# Altium PCB triumvi_integrated_v2_base.PcbDoc (part 2 of 2)
Units mil, origin at the board's own origin, x right, y up, seen from the top; angles counter-clockwise.
Board outline 2450 x 750 mil, 6 copper layers (Top Layer, GND, Signal Layer 1, Signal Layer 2, VCC, Bottom Layer), stack 48.468 mil thick; 139 components, 107 nets, 501 pads, 187 vias.
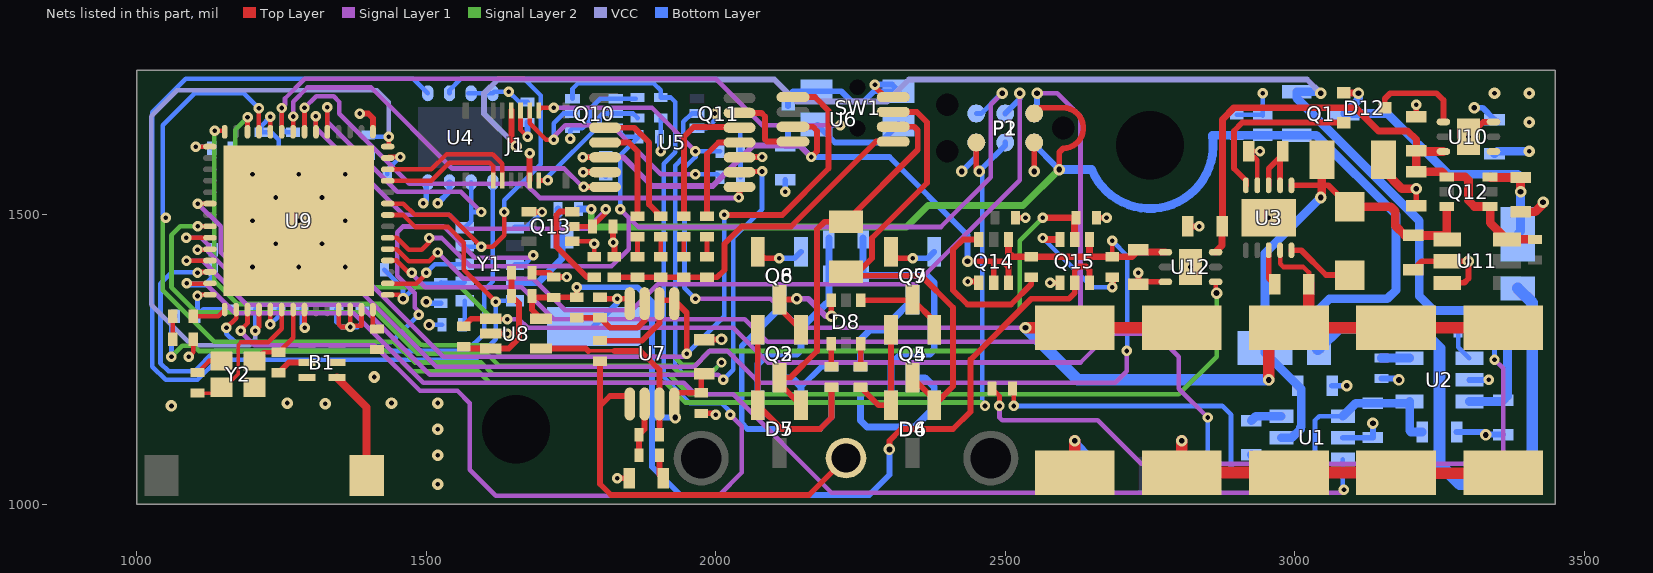
[diagram p6: the nets of this part, all layers, seen from the top]

## Via types
v1: diameter 18, hole 8, Top Layer to Bottom Layer, 121 vias
v2: diameter 20, hole 10, Top Layer to Bottom Layer, 37 vias
v3: diameter 22, hole 8, Top Layer to Bottom Layer, 14 vias
v4: diameter 20, hole 8, Top Layer to Bottom Layer, 13 vias
v5: diameter 21.65, hole 8, Top Layer to Bottom Layer, 2 vias

## Nets (pads, with @x,y where several pads share a name; then routed paths per layer and width w, separated by ;. In a path a pad name is that pad's centre, name@x,y a point inside that pad or via, vN(x,y) a via of type N, cw(c..) or ccw(c..) an arc to the next point about the centre after c; other vN are vias at no path point) (continued)
GND: B1.2 B1.5 B1.6 C2.1 C3.1 C4.2 C5.2 C8.2 C9.2 C10.2 C11.2 C12.2 C13.2 C15.2 C16.2 C17.2 C18.2 C19.2 C20.2 C21.2 C22.2 C23.2 C24.2 C25.2 C26.2 C27.2 C28.2 C29.2 C30.2 C31.2 C32.2 C33.2 C34.2 C35.2 C36.2 C37.2 C38.2 C39.2 C40.2 C41.2 C42.2 C43.2 C44.2 C45.2 C46.2 C47.2 D9.1 J1.5 J1.9 P1.5 P2.2 pad.@2650,1050 Q6.2 Q7.2 Q8.2 Q9.2 Q10.1 Q10.4 Q11.1 Q13.1 Q14.1 Q15.1 R2.2 R3.2 R4.2 R24.2 R25.2 R33.2 R35.2 R38.2 R41.2 R42.2 SW1.2 U1.2 U2.2 U3.9 U3.11 U4.4 U5.3 U5.13 U6.4 U7.4 U8.2 U9.1 U9.57 U10.3 U10.7 U11.2 U11.3 U12.3 U12.7 Y1.6 Y2.2 Y2.4 | length 3883.2
  Top Layer w8: C36.2@1105,1227.72 1124.92,1247.64 Y2.4@1146.46,1247.64 ; J1.9@1662.87,1680.63 1662.87,1647.13 v1(1675,1635) ; C15.2@2920.47,1610 v1(2940,1610) ; C15.2@2930.24,1600.24 2935.32,1595.16 U3.9@2935.32,1551.1
  Top Layer w10: C37.2@1245,1227.28 1262.72,1245 B1.5@1294.41,1245 ; v1(1385,1675) 1400,1675 1407.95,1667.05 U9.1@1407.95,1643.54 ; U8.2@1611.69,1295 v1(1640,1295) ; Q13.1@1677.6,1505.59 1678.19,1505 v1(1700,1505) ; J1.5@1678.62,1559.37 v1(1678.62,1606.38) ; R25.2@1682.72,1400 1712.72,1400 C23.2@1720,1392.72 v1(1742.72,1392.72) ; v1(1771.18,1573.82) U5.13@1808.86,1573.82 ; R24.2@1800,1357.72 1802.72,1355 v1(1830,1355) 1849.29,1355 U7.4@1851.61,1352.68 ; R38.2@1822.72,1480 v1(1822.72,1452.28) 1825,1450 C22.2@1825,1427.72 ; v1(1830,1045) C26.2@1850.47,1045 ; C24.2@1975,1157.28 1997.72,1157.28 v1(2000,1155) ; C25.2@1980,1284.53 2009.53,1284.53 v2(2010,1285) ; U5.3@2041.14,1599.41 2041.73,1600 v1(2080,1600) ; Q8.2@2072.6,1436.34 2083.94,1425 v1(2110,1425) ; v1(2275,1725) 2275,1721.06 U6.4@2292.68,1703.39 ; Q7.2@2302.6,1436.34 2313.94,1425 v1(2340,1425) ; v1(2435,1385) 2452.01,1385 Q14.1@2454.41,1382.6 ; R41.2@2517.72,1495 v1(2535,1495) ; v2(2550,1575) P2.2@2550,1625 ; v1(2577.4,1382.6) Q15.1@2594.41,1382.6 ; R42.2@2657.72,1495 v1(2675,1495) ; v1(2730,1400) C46.2@2730,1380.47 2733.94,1384.41 U12.3@2776.69,1384.41 ; C47.2@2815.47,1480 v1(2835,1480) ; C44.2@3205,1405.47 3219.53,1420 U11.2@3263.43,1420 v2(3300,1420) 3300,1390 3292.6,1382.6 U11.3@3263.43,1382.6 U11.3@3261.02,1385 ; C45.2@3210,1515.47 v2(3210,1545) ; C42.2@3210,1669.53 v1(3210,1690) ; v5(3300,1635) 3325.59,1660.59 U10.3@3343.31,1660.59
  Top Layer w15: C13.2@3153.15,1595 3153.15,1576.85 3185,1545 v2(3210,1545) ; C41.2@3390,1505.47 3415.47,1505.47 3429,1519 v2(3429,1521.88)
  Top Layer w20: C8.2@2620,1055 v2(2620,1110) ; v2(2805,1110) C9.2@2805,1055 C12.2@2990,1055 C11.2@3175,1055 3175,1054 3360,1054 C10.2@3360,1055
  Bottom Layer w8: v1(1748.82,1631.38) 1748.82,1645.63 Q10.4@1752.6,1649.41 1769.41,1649.41 1782.2,1662.2 1782.2,1682.2 1800.59,1700.59 Q10.1@1827.4,1700.59 R33.2@1862.13,1700.59 ; Q11.1@1967.6,1649.41 1984.41,1649.41 2000,1665 2000,1673.58 v1(1998.58,1675) ; R3.2@2900,1672.72 2944.02,1672.72 D9.1@2945,1671.73 v1(2945,1710)
  Bottom Layer w10: C40.2@1165,1372.72 C40.2@1167.72,1372.72 ; R4.2@1167.72,1405 C40.2@1167.72,1372.72 ; C35.2@1167.72,1440 1167.72,1410 v3(1200,1410) C29.2@1200,1372.72 ; v3(1200,1570) 1215,1570 C31.2@1215,1607.28 ; C28.2@1245,1372.72 C29.2@1205,1372.72 C29.2@1200,1372.72 ; C34.2@1345,1372.72 1360,1372.72 v3(1360,1410) 1392.28,1410 C38.2@1392.28,1405 1390,1405 C32.2@1390,1372.72 ; v3(1360,1570) C39.2@1397.28,1570 ; v1@1492.28,1517.28 v1(1495,1520) 1500,1525 1500,1553.66 U4.4@1502.8,1556.46 ; v2(1500,1350) 1502.72,1347.28 C17.2@1525,1347.28 ; Y1.6@1653.31,1477.99 1672.99,1477.99 v1(1700,1505) ; v1(1675,1635) C16.2@1675,1659.57 ; v1(1771.18,1573.82) 1803.46,1573.82 C19.2@1810,1567.28 ; C18.2@1789.41,1307.17 1830,1347.76 v1(1830,1355) ; v1(2110,1425) 2136.06,1425 Q6.2@2147.4,1436.34 ; v1(2120,1540) C20.2@2120,1560.47 ; C21.2@2125,1687.72 2125,1705 2133.54,1713.54 SW1.2@2174.13,1713.54 2216.85,1713.54 2234.74,1695.65 2255.26,1695.65 2273.15,1713.54 SW1.2@2315.87,1713.54 2304.41,1725 v1(2275,1725) ; v1(2340,1425) 2366.06,1425 Q9.2@2377.4,1436.34 ; v2(2425,1575) 2450,1600 P1.5@2450,1625 ; v2(2620,1110) 2650,1080 pad.@2650,1050 ; C2.1@3064.53,1205 v2(3090,1205) ; U1.2@3083.15,1115 3134.53,1115 C3.1@3135,1115.47 v2(3135,1140) ; R2.2@3150,1217.28 3177.72,1217.28 v2(3180,1215) ; C4.2@3279.53,1125 3325,1125 v2(3330,1120) 3330.47,1120.47 C5.2@3360,1120.47 ; U2.2@3301.57,1215 v1(3335,1215) ; v2(3310,1685) 3324.53,1685 C43.2@3345,1664.53 ; C40.2@1167.72,1372.72 C29.2@1200,1372.72
  other v3: 1280,1410 1240,1450 1320,1450 1200,1490 1280,1490 1360,1490 2955,1495 1240,1530 1320,1530 1280,1570
  other v4: 1520,1035 1520,1085 1520,1130 1060,1170 1325.4,1174 1260,1175 1440,1175 1520,1175 1410,1220
  other v5: 2820,1410
I2C_SCL: J1.1 U9.53 | length 222.3
  Top Layer w8: U9.53@1433.54,1558.9 1508.9,1558.9 1540,1590 1610,1590 1615.63,1584.37 J1.1@1615.63,1559.37
I2C_SDA: J1.2 U9.54 | length 244.7
  Top Layer w8: U9.54@1433.54,1578.58 1508.58,1578.58 1535,1605 1614.8,1605 1631.38,1588.42 J1.2@1631.38,1559.37
IN+: D4.1 Q4.3 R9.1 U6.3 | length 864.2
  Top Layer w10: U6.3@2292.68,1677.8 U6.3@2306.61,1677.8 2347.2,1677.8 2365,1660 2365,1555 2270,1460 2270,1425 2246.69,1401.69 R9.1@2225,1401.69 2231.69,1395 2355,1395 2410,1340 2410,1203.94 D4.1@2377.4,1171.34 2377.4,1181.26 Q4.3@2340,1218.66
IN-: D5.1 Q2.3 R9.2 U6.2 | length 680.5
  Top Layer w10: D5.1@2147.4,1171.34 2110,1208.74 Q2.3@2110,1218.66 2128.66,1218.66 2175,1265 2175,1475 2188.31,1488.31 R9.2@2225,1488.31 2349,1612.31 2349,1646 2342.8,1652.2 U6.2@2306.61,1652.2 U6.2@2292.68,1652.2
LDO_EN: D12.3 U10.4 | length 163.2
  Top Layer w10: D12.3@3155.43,1685 3155.43,1700.43 3165,1710 3245,1710 3256.69,1698.31 U10.4@3256.69,1660.59
NetANT1_1: ANT1.1 B1.1 | length 190.8
  Top Layer w14: B1.1@1345.59,1219.41 1397.17,1167.83 ANT1.1@1397.17,1050
NetC1_1: C1.1 U1.4 | length 55.1
  Bottom Layer w15: C1.1@2925,1085.47 2932.87,1077.6 U1.4@2976.85,1077.6
NetC1_2: C1.2 U1.6 | length 55.1
  Bottom Layer w15: C1.2@2925,1144.53 2932.87,1152.4 U1.6@2976.85,1152.4
NetC3_2: C3.2 C4.1 D2.1 U1.1 U2.4 | length 990
  Top Layer w8: D2.1@2512.72,1200 2515,1197.72 v1(2515,1170)
  Bottom Layer w8: v1(2515,1170) 2875,1170 2890,1155 2890,1065 2905,1050 3020,1050 3035,1065 3035,1145 3042.4,1152.4 U1.1@3083.15,1152.4
  Bottom Layer w15: U1.1@3083.15,1152.4 3105.28,1174.53 C3.2@3135,1174.53 3195.35,1174.53 U2.4@3198.43,1177.6 3198.43,1127.05 3200.47,1125 C4.1@3220.47,1125
NetC6_1: C6.1 C7.1 D6.1 Q5.2 | length 464.5
  Bottom Layer w12: C7.1@2254.53,1460 C6.1@2254.53,1395 2365,1395 2377.4,1382.6 Q5.2@2377.4,1301.34 2377.4,1267.4 2370,1260 2320,1260 2302.6,1242.6 D6.1@2302.6,1171.34
NetC6_2: C6.2 C7.2 D7.1 Q3.2 | length 370.1
  Bottom Layer w12: D7.1@2072.6,1171.34 2072.6,1242.6 2090,1260 2140,1260 2147.4,1267.4 Q3.2@2147.4,1301.34 2147.4,1303.51 2190.89,1347 2193.06,1347 2195.47,1349.41 C6.2@2195.47,1395 C7.2@2195.47,1460
NetC14_2: C14.2 U3.3 | length 63.2
  Top Layer w10: U3.3@2955,1438.9 2955,1390.47 C14.2@2965.47,1380
NetC15_1: C15.1 U3.7 U3.8 | length 117.6
  Top Layer w10: U3.8@2955,1551.1 2955,1580 C15.1@2974.68,1599.68 ; U3.7@2974.68,1551.1 C15.1@2974.68,1599.68 ; C15.1@2979.53,1610 2974.68,1605.16 C15.1@2974.68,1599.68
NetC18_1: C18.1 R11.2 Y1.9 | length 186.5
  Bottom Layer w12: Y1.9@1653.31,1383.5 1693.5,1383.5 1734.29,1424.29 C18.1@1734.29,1461.69 1727.28,1468.7 R11.2@1727.28,1510
NetC26_1: C26.1 R27.2 | length 42.8
  Top Layer w10: R27.2@1902.72,1085 1902.72,1051.81 C26.1@1909.53,1045
NetC27_1: C27.1 C29.1 U9.32 U9.56 | length 1171.3
  Top Layer w8: v1(1205,1300) 1211.1,1306.1 U9.32@1211.1,1336.46 ; U9.56@1433.54,1617.95 1435,1619.41 v1(1435,1635)
  VCC w8: v1(1205,1300) 1205,1285 1195,1275 1095,1275 1025,1345 1025,1670 1070,1715 1415,1715 1435,1695 v1(1435,1635)
  Bottom Layer w8: v1(1205,1300) C29.1@1205,1337.28 ; C27.1@1407.72,1635 v1(1435,1635)
NetC36_1: C36.1 U9.34 Y2.1 | length 253.7
  Top Layer w6: C36.1@1105,1192.28 1136.38,1192.28 Y2.1@1146.46,1202.36 1152.36,1202.36 1175,1225 1175,1275 1180,1280
  Top Layer w8: 1180,1280 1226.87,1280 1250.47,1303.6 U9.34@1250.47,1336.46
NetC37_1: C37.1 U9.35 Y2.3 | length 131.9
  Top Layer w8: Y2.3@1203.54,1247.64 1218.62,1262.72 C37.1@1245,1262.72 1270.16,1287.87 U9.35@1270.16,1336.46
NetC40_1: C40.1 R34.1 U9.28 | length 122.4
  Top Layer w8: v1(1105,1360) 1107.05,1362.05 U9.28@1126.46,1362.05
  Bottom Layer w8: R34.1@1102.72,1325 R34.1@1105,1327.28 ; v1(1105,1360) R34.1@1105,1327.28 ; C40.1@1165,1337.28 1115,1337.28 R34.1@1105,1327.28
NetD2_2: D2.2 R1.1 | length 1200.1
  Top Layer w8: D2.2@2477.28,1200 2490,1187.28 v1(2490,1170)
  Signal Layer 1 w8: v1(2490,1170) 2490,1150 2495,1145 2660,1145 2735,1070 3350,1070 3360,1080 3360,1235 v1(3345,1250)
  Bottom Layer w8: R1.1@3317.72,1300 3345,1272.72 v1(3345,1250)
NetD4_2: D4.2 Q4.2 R5.1 | length 195.4
  Top Layer w10: R5.1@2250,1202.28 2280.94,1171.34 D4.2@2302.6,1171.34 Q4.2@2302.6,1301.34
NetD5_2: D5.2 Q2.2 R6.1 | length 335.1
  Top Layer w10: Q2.2@2072.6,1301.34 D5.2@2072.6,1171.34 2113.94,1130 2180,1130 2200,1150 R6.1@2200,1202.28
NetD6_2: D6.2 Q5.3 R7.1 | length 282.5
  Bottom Layer w12: R7.1@2250,1202.28 2250,1145 2261.25,1133.75 2343.75,1133.75 2377.4,1167.4 D6.2@2377.4,1171.34 2377.4,1202.6 2361.34,1218.66 Q5.3@2340,1218.66
NetD7_2: D7.2 Q3.3 R8.1 | length 142.5
  Bottom Layer w10: 2147.4,1202.6 2182.52,1237.72 R8.1@2200,1237.72
  Bottom Layer w12: Q3.3@2110,1218.66 2131.34,1218.66 2147.4,1202.6 D7.2@2147.4,1171.34
NetD8_1: D8.1 Q4.1 Q7.3 | length 157.7
  Top Layer w10: D8.1@2250.59,1352.4 2338.74,1352.4 Q7.3@2340,1353.66 2377.4,1316.26 Q4.1@2377.4,1301.34
NetD8_3: D8.3 Q2.1 Q8.3 | length 198.4
  Top Layer w10: v2(2140,1355) 2138.66,1353.66 Q8.3@2110,1353.66 2110,1338.74 Q2.1@2147.4,1301.34 ; D8.3@2199.41,1352.4 2199.41,1325.59 v2(2200,1325)
  Signal Layer 1 w10: v2(2140,1355) 2160,1355 2190,1325 v2(2200,1325)
NetD8_4: D8.4 R6.2 | length 40.1
  Top Layer w10: D8.4@2199.41,1277.6 2199.41,1238.31 R6.2@2200,1237.72
NetD8_6: D8.6 R5.2 | length 40.1
  Top Layer w10: R5.2@2250,1237.72 2250.59,1238.31 D8.6@2250.59,1277.6
NetD10_1: D10.1 R31.1 | length 40
  Top Layer w8: R31.1@1062.28,1285 D10.1@1062.28,1325
NetL1_2: L1.2 U3.5 | length 118.4
  Top Layer w10: U3.5@2994.37,1438.9 3011.1,1438.9 3054.06,1395.94 L1.2@3095,1395.94
NetQ3_1: Q3.1 Q6.3 R8.2 | length 460.3
  Bottom Layer w10: Q3.1@2072.6,1301.34 2045,1273.74 2045,1140 2055,1130 2180,1130 2200,1150 R8.2@2200,1202.28
  Bottom Layer w12: Q3.1@2072.6,1301.34 2110,1338.74 Q6.3@2110,1353.66
NetQ5_1: Q5.1 Q9.3 R7.2 | length 174.5
  Bottom Layer w12: R7.2@2250,1237.72 2250,1285 2266.34,1301.34 Q5.1@2302.6,1301.34 2302.6,1316.26 Q9.3@2340,1353.66
NetQ10_6: Q10.6 R32.2 U9.31 | length 2065
  Top Layer w8: v1(1180,1300) 1180,1301.87 1191.42,1313.29 U9.31@1191.42,1336.46
  Signal Layer 1 w8: v1(1180,1300) 1180,1298.13 1203.13,1275 1410.2,1275 1489.2,1196 1554,1196 1575,1175 1575,1060 1620,1015 2005,1015 2045,1055 2045,1135 v1(2025,1155)
  Bottom Layer w8: Q10.6@1752.6,1700.59 1752.6,1717.6 1762.72,1727.72 1892.28,1727.72 1905,1715 R32.2@1905,1702.72 1922.28,1702.72 1930,1695 1930,1608.13 1910,1588.13 1910,1220 1955,1175 2010,1175 2025,1160 v1(2025,1155)
NetQ11_2: Q11.2 U9.22 | length 1732
  Top Layer w8: v1(1105.16,1480.16) U9.22@1126.46,1480.16
  Signal Layer 2 w8: v1(1105.16,1480.16) 1075.16,1480.16 1060,1465 1060,1375 1103,1332 1413,1332 1485,1260 1605,1260 1620,1245 1620.2,1245 1626.2,1239 1924.33,1239 1936.33,1227 1992,1227 v1(2010,1245)
  Bottom Layer w8: Q11.2@1967.6,1675 1958.3,1675 1944,1660.7 1944,1599.2 1930,1585.2 1930,1240 1945,1225 1990,1225 v1(2010,1245)
NetQ13_5: Q13.5 R38.1 U9.6 | length 712.7
  Top Layer w8: U9.6@1309.53,1643.54 v1(1309.53,1670.47) ; Q13.5@1752.4,1480 R38.1@1787.28,1480 1810,1502.72 v1(1810,1510) ; v1@1812.5,1507.5 v1@1815,1510
  Signal Layer 1 w8: v1(1309.53,1670.47) 1309.53,1650.47 1460,1500 1540,1500 1564,1476 1777.87,1476 1810,1508.13 v1(1810,1510)
NetQ13_6: Q13.6 R37.2 | length 171.6
  Top Layer w10: Q13.6@1752.4,1505.59 1730.59,1505.59 1725,1500 1725,1445 1777.72,1392.28 R37.2@1790,1392.28
NetQ14_6: Q14.6 R39.2 | length 293.8
  Top Layer w10: Q14.6@2454.41,1457.4 2427.4,1457.4 2410,1440 2410,1370 2435,1345 2510,1345 2545,1380 R39.2@2545,1392.28
NetQ15_6: Q15.6 R40.2 | length 203
  Top Layer w12: v1(2565,1460) 2567.6,1457.4 Q15.6@2594.41,1457.4 ; v1(2685,1375) R40.2@2685,1392.28
  Bottom Layer w8: v1(2565,1460) 2650,1375 v1(2685,1375)
NetR1_2: R1.2 U2.1 | length 55.6
  Bottom Layer w8: R1.2@3282.28,1300 3282.28,1271.69 U2.1@3301.57,1252.4
NetR2_1: R2.1 U2.5 | length 48.6
  Bottom Layer w15: R2.1@3150,1252.72 3198.11,1252.72 U2.5@3198.43,1252.4
NetR4_1: R4.1 U1.3 U9.27 | length 2307.9
  Top Layer w8: v1(1086.73,1381.73) 1087.46,1381 1125.72,1381 U9.27@1126.46,1381.73
  Signal Layer 1 w8: v1(1086.73,1381.73) 1087.46,1381 1119,1381 1170,1330 1375,1330 1495,1210 1945,1210 1965,1190 2030,1190 2200,1020 3080,1020 v1(3085,1025)
  Bottom Layer w8: U1.3@3083.15,1077.6 3083.15,1026.85 v1(3085,1025)
  Bottom Layer w10: v1(1086.73,1381.73) 1088.46,1380 1120,1380 1132.28,1392.28 R4.1@1132.28,1405
NetR10_1: R10.1 Y1.1 | length 43.8
  Bottom Layer w8: R10.1@1562.28,1310 1566.69,1314.41 Y1.1@1566.69,1352.01
NetR12_2: R12.2 R13.1 | length 34.6
  Top Layer w8: R12.2@1985,1427.72 R13.1@1985,1462.28
NetR13_2: R13.2 U5.4 | length 171.7
  Top Layer w10: R13.2@1985,1497.72 1985,1605 2005,1625 U5.4@2041.14,1625
NetR14_2: R14.2 R15.1 | length 34.6
  Top Layer w8: R14.2@1945,1427.72 R15.1@1945,1462.28
NetR15_2: R15.2 U5.5 | length 241
  Top Layer w10: R15.2@1945,1497.72 1945,1635 1961.97,1651.97 2039.76,1651.97 U5.5@2041.14,1650.59
NetR16_2: R16.2 R17.1 | length 34.6
  Top Layer w8: R16.2@1865,1427.72 R17.1@1865,1462.28
NetR17_2: R17.2 U5.11 | length 174.6
  Top Layer w10: U5.11@1808.86,1625 1850,1625 1865,1610 R17.2@1865,1497.72
NetR18_2: R18.2 R19.1 | length 34.6
  Top Layer w8: R18.2@1905,1427.72 R19.1@1905,1462.28
NetR19_2: R19.2 U5.10 | length 222.3
  Top Layer w10: U5.10@1808.86,1650.59 1859.41,1650.59 1885,1625 1885,1517.72 R19.2@1905,1497.72
NetR20_2: R20.2 R21.1 R25.1 U8.3 | length 221.9
  Top Layer w10: R21.1@1565,1272.28 1567.87,1269.41 U8.3@1611.69,1269.41 1642.69,1269.41 1660,1286.72 1660,1347.28 R20.2@1647.28,1360 R25.1@1647.28,1400
NetR26_1: R26.1 R27.1 U7.6 | length 106.4
  Top Layer w10: R27.1@1867.28,1085 R26.1@1867.28,1120 1877.2,1129.92 U7.6@1877.2,1173.39 U7.6@1877.2,1187.32
NetR30_2: R30.2 SW1.1 U9.9 | length 1309.1
  Top Layer w8: U9.9@1250.47,1643.54 v1(1250.47,1684.53)
  Signal Layer 1 w8: v1(1250.47,1684.53) 1256.16,1690.21 1256.16,1700.96 1290.2,1735 2000,1735 2080,1655 v1(2215,1655)
  Bottom Layer w8: v1(1250.47,1684.53) 1250.47,1649.53 1257.28,1642.72 R30.2@1270,1642.72 ; SW1.1@2195,1655 v1(2215,1655)
  Bottom Layer w10: SW1.1@2175.59,1655 2205.8,1624.79 2284.2,1624.79 SW1.1@2315.87,1656.46
NetR35_1: R35.1 U9.42 | length 29.4
  Top Layer w8: R35.1@1407.95,1307.05 U9.42@1407.95,1336.46
NetU4_1: U4.1 U9.26 | length 1090.9
  Top Layer w8: v1(1105,1400) 1106.42,1401.42 U9.26@1126.46,1401.42
  Bottom Layer w8: v1(1105,1400) 1104.27,1400.73 1060.73,1400.73 1041,1381 1041,1244 1055,1230 1100,1230 1135,1265 1570,1265 1600,1295 1600,1370 1615,1385 U4.1@1615,1556.46
NetU9_11: U9.11 U12.4 | length 2585.9
  Top Layer w8: U9.11@1211.1,1643.54 1211,1643.65 1211,1683.8 v1(1211.1,1683.9) ; U12.4@2863.31,1384.41 2863.31,1366.69 v2(2865,1365) v2@2865,1370
  Signal Layer 2 w8: v1(1050,1495) 1045,1490 1045,1370 1134,1281 1444,1281 1480,1245 1595,1245 1615,1225 1918.53,1225 1953.53,1190 2800,1190 2865,1255 v2(2865,1365)
  Bottom Layer w8: v1(1050,1495) 1045,1500 1045,1655 1100,1710 1185,1710 v1(1211.1,1683.9)
PD3: D10.2 U9.29 | length 59.1
  Top Layer w8: D10.2@1097.72,1325 1140.59,1325 U9.29@1152.05,1336.46
PGOOD: D12.2 U3.10 | length 298
  Top Layer w10: U3.10@2915.63,1551.1 2915.63,1559.37 2895,1580 2895,1645 2909.41,1659.41 D12.2@3084.57,1659.41
R\D\Y\_\I\N\: D11.2 J1.8 Q10.5 | length 481
  Top Layer w8: J1.8@1678.62,1680.63 1678.62,1658.25 1706.87,1630 v1(1720,1630)
  Signal Layer 1 w8: v1(1720,1630) 1720,1635 1740,1655 1820,1655 1905,1570 v1(1965,1570)
  Bottom Layer w8: v1(1720,1630) 1720,1658.13 1736.87,1675 Q10.5@1752.6,1675 ; v1(1965,1570) 2002.28,1570 D11.2@2007.28,1565
R\E\A\D\Y\: D11.1 Q11.6 R28.2 | length 84.5
  Bottom Layer w8: Q11.6@2042.4,1649.41 2042.4,1610.31 R28.2@2042.72,1610 D11.1@2042.72,1565
R\E\S\E\T\: P1.3 P2.6 R34.2 | length 2061.7
  Top Layer w10: P2.6@2450,1625 2450,1580 v2(2455,1575)
  Signal Layer 2 w8: v1(1060,1255) 1079,1274 1097.87,1274 1106.87,1265 1440,1265 1475,1230 1590,1230 1610,1210 1913.73,1210 1947.73,1176 2459,1176 v1(2465,1170)
  Bottom Layer w8: v1(1060,1255) 1060,1317.72 R34.2@1067.28,1325 ; v2@2460,1580 2460,1175 v1(2465,1170)
  Bottom Layer w10: v2(2455,1575) 2460,1580 2500,1620 P1.3@2500,1625
RG1: C22.1 R12.1 R14.1 R16.1 R18.1 U6.1 | length 605
  Top Layer w10: C22.1@1825,1392.28 R16.1@1865,1392.28 R18.1@1905,1392.28 R14.1@1945,1392.28 R12.1@1985,1392.28 2002.28,1392.28 2015,1405 2015,1450 2045,1480 2130,1480 2276.61,1626.61 U6.1@2306.61,1626.61
RG2: U5.6 U6.8 | length 130.1
  Top Layer w10: U5.6@2041.14,1676.18 2078.82,1676.18 2085,1670 2085,1630 2088.39,1626.61 U6.8@2127.32,1626.61
RTC_CLKOUT: U9.44 Y1.3 | length 148.6
  Top Layer w8: U9.44@1433.54,1381.73 1434.28,1381 1482.87,1381 1500,1398.13 v1(1500,1400)
  Bottom Layer w8: v1(1500,1400) 1515,1415 Y1.3@1566.69,1415
RTC_CS: U9.30 Y1.8 | length 865.4
  Top Layer w8: v1(1155,1305) 1171.73,1321.73 U9.30@1171.73,1336.46
  Signal Layer 1 w8: v1(1487.14,1327.5) 1487.14,1332.86 1480,1340 1480,1365 1450,1395 1450,1470 1460,1480 1530,1480 1584,1426 1681.03,1426 v1(1685.01,1429.99)
  Bottom Layer w8: v1(1155,1305) 1155,1295 1170,1280 1439.64,1280 v1(1487.14,1327.5) ; Y1.8@1653.31,1415 1670.03,1415 v1(1685.01,1429.99)
SPI_CLK: U4.6 U9.51 Y1.4 | length 719.4
  Top Layer w8: U9.51@1433.54,1519.53 1460.47,1519.53 1480,1500 1540,1500 v1(1595,1445) 1615,1445 1635,1465 v1(1635,1505)
  Bottom Layer w8: U4.6@1540.2,1710 1540.2,1715.2 1560,1735 1668.83,1735 1697.62,1706.21 1697.62,1587.62 1635,1525 v1(1635,1505) ; Y1.4@1566.69,1446.5 1568.19,1445 v1(1595,1445)
SPI_MISO: U4.2 U9.5 Y1.5 | length 499.1
  Top Layer w8: v1(1329.21,1685.79) U9.5@1329.21,1643.54 U9.5@1330,1644.33
  Signal Layer 1 w8: v1(1329.21,1685.79) 1329.21,1660.79 1450,1540 1560,1540 v1(1595,1505)
  Bottom Layer w8: Y1.5@1566.69,1477.99 1577.6,1488.9 1577.6,1505 ; U4.2@1577.6,1556.46 1577.6,1505 ; v1(1595,1505) 1577.6,1505
SPI_MOSI: U4.5 U9.50 Y1.10 | length 1955.8
  Top Layer w8: U9.50@1433.54,1499.84 1460.36,1499.84 1481.2,1479 1537.87,1479 1565,1451.87 1565,1405 v1(1620,1350)
  Bottom Layer w8: U4.5@1502.8,1710 1477.8,1735 1085,1735 1027,1677 1027,1238 1050,1215 1105,1215 1140,1250 1585,1250 1620,1285 v1(1620,1350) 1622.01,1352.01 Y1.10@1653.31,1352.01
SW_A0: U5.1 U9.7 | length 903
  Top Layer w8: U9.7@1289.84,1643.54 v1(1289.84,1684.84)
  Top Layer w10: v1(2040,1530) 2041.14,1531.14 U5.1@2041.14,1548.23
  Signal Layer 1 w8: v1(1289.84,1684.84) 1310,1705 1340,1705 1350,1695 1350,1675 1471,1554 1671,1554 1695.77,1529.23 v1@2040,1529.23
SW_A1: U5.14 U9.8 | length 671.8
  Top Layer w8: U9.8@1270.16,1643.54 v1(1270.16,1669.84)
  Top Layer w10: v1(1771.77,1548.23) U5.14@1808.86,1548.23
  Signal Layer 1 w8: v1(1270.16,1669.84) 1270.16,1695.16 1295,1720 1405,1720 1545,1580 1738.13,1580 1769.9,1548.23 v1(1771.77,1548.23)
SW_EN: U5.2 U9.25 | length 1479.1
  Top Layer w8: v1(1086,1421) 1126.35,1421 U9.25@1126.46,1421.1 ; U5.2@2041.14,1573.82 2042.32,1575 v1(2080,1575)
  Signal Layer 1 w8: v1(1086,1421) 1114,1421 1190,1345 1385,1345 1506,1224 2004.16,1224 v1(2012.72,1215.44)
  Bottom Layer w8: v1(2012.72,1215.44) 2030,1232.73 2030,1460 2080,1510 v1(2080,1575)
TCK: P1.4 U9.47 | length 1436.3
  Top Layer w8: U9.47@1433.54,1440.79 1449.01,1440.79 1469.8,1420 1505,1420 v1(1520,1435)
  Signal Layer 1 w8: v1(1520,1435) 1565,1390 1685,1390 1740,1335 1855,1335 1900,1380 2345,1380 2525,1560 v2(2525,1710)
  Bottom Layer w10: P1.4@2500,1675 2525,1700 v2(2525,1710)
TDO: P1.6 Q10.3 R29.2 U9.48 | length 1614.3
  Top Layer w8: U9.48@1433.54,1460.47 1449.13,1460.47 1469.6,1440 1492.5,1440 1505,1452.5 v1(1505,1460)
  Signal Layer 1 w8: v1(1505,1460) 1526.97,1460 1575.99,1410.99 1734.12,1410.99 1734.85,1411.72 1750.59,1411.72 1751.32,1410.99 1818.54,1410.99 1819.27,1411.72 1820,1410.99 1850,1440.99 1850,1495 ; v1(1835,1510) 1850,1495 ; v2(2495,1710) 2475,1690 2475,1565 2389,1479 1866,1479 1850,1495
  Bottom Layer w8: Q10.3@1827.4,1649.41 1841.81,1635 R29.2@1867.28,1635 1835,1602.72 v1(1835,1510) ; P1.6@2450,1675 2458.28,1675 v2@2493.28,1710 ; v2@2490,1710 v2@2493.28,1710 ; v2(2495,1710) v2@2493.28,1710
TMS: P1.2 U9.46 | length 1753.3
  Top Layer w8: U9.46@1433.54,1421.1 1448.9,1421.1 1470,1400 v1(1475,1400)
  Signal Layer 1 w8: v1(1475,1400) 1475,1398.13 1498.13,1375 1665,1375 1720,1320 2050,1320 2089,1281 2596,1281 2630,1315 2630,1670 2590,1710 v2(2555,1710)
  Bottom Layer w10: P1.2@2550,1675 2555,1680 v2(2555,1710)
V_BATT: C5.1 J1.10 Q1.2 U2.3 | length 2496.3
  Top Layer w10: 1647.13,1627.87 J1.10@1647.13,1680.63
  VCC w10: v2(1655.77,1618.88) 1600,1674.64 1600,1710 1624,1734 2101,1734 2139.35,1695.65 2295.65,1695.65 2334,1734 3021,1734 v2(3045,1710)
  Bottom Layer w15: v2@3037.6,1712.4 Q1.2@3003.66,1712.4 3003.66,1701.18 3114.85,1590 3115,1590 3215,1490 3215,1360 3240,1335 3330,1335 3367.5,1297.5 3367.5,1187.03 C5.1@3360,1179.53 3358.07,1177.6 U2.3@3301.57,1177.6
V_EXTERNAL: C41.1 D3.2 D12.1 Q1.3 Q12.6 | length 597.9
  Top Layer w12: D12.1@3084.57,1710.59 3109.41,1710.59 v2(3110,1710)
  Top Layer w15: Q12.6@3337.4,1565.59 3338.46,1564.53 C41.1@3390,1564.53 v2(3390,1540)
  Bottom Layer w15: v2(3110,1710) 3110,1698.66 Q1.3@3086.34,1675 3160,1675 3265,1570 3385,1570 3390,1565 v2(3390,1540) 3390,1471.48 D3.2@3385,1466.48
V_HARVEST: C2.2 C13.1 C44.1 D1.2 L1.1 Q12.3 U1.5 U3.6 U11.1 | length 950.1
  Top Layer w10: U3.6@2994.37,1551.1 3046.85,1551.1 3057.95,1551.1 L1.1@3095,1514.06
  Top Layer w15: v2(3045,1530) 3046.85,1531.85 3046.85,1551.1 C13.1@3046.85,1595 ; L1.1@3095,1514.06 3165.94,1514.06 3173.78,1506.22 3173.78,1481.22 3190.47,1464.53 C44.1@3205,1464.53 3256.3,1464.53 U11.1@3262.6,1458.23 ; Q12.3@3262.6,1514.41 U11.1@3262.6,1458.23 ; U11.1@3263.43,1457.4 U11.1@3262.6,1458.23
  Bottom Layer w15: U1.5@2976.85,1115 2995,1115 3010,1130 3010,1132.96 3011.02,1133.98 3011.02,1199.45 C2.2@3005.47,1205 2948.52,1261.95 D1.2@2948.52,1270 2948.52,1433.52 v2(3045,1530)
V_PROG: D1.1 D3.1 D9.2 P1.1 P2.1 Q1.1 R3.1 R11.1 | length 3197.2
  Top Layer w10: P2.1@2550,1675 2560,1685 2600,1685 cw(c2600,1650) 2600,1615 2593.27,1608.27 v2(2593.27,1578.27)
  Signal Layer 2 w12: v1(1785,1510) 1785,1485 1791,1479 2329.3,1479 2366.3,1516 2531,1516 v2(2593.27,1578.27)
  Bottom Layer w10: P1.1@2550,1625 2550,1621.54 v2@2588.27,1583.27
  Bottom Layer w12: R11.1@1762.72,1510 v1(1785,1510)
  Bottom Layer w15: v2(2593.27,1578.27) 2648.93,1578.27 ; 2648.93,1578.94 ccw(c2750,1620) 2857.72,1637.28 R3.1@2900,1637.28 2900.31,1637.6 Q1.1@3003.66,1637.6 3037.4,1637.6 3175,1500 3175,1370 3160,1355 3060,1355 3042.03,1337.03 D1.1@3042.03,1270
  Bottom Layer w20: D1.1@3040,1267.97 D1.1@3042.03,1270 3077.03,1305 3215,1305 3250,1270 3250,1070 3285,1035 3380,1035 3410,1065 3410,1347.97 D3.1@3385,1372.97
V_SELECTED: C42.1 C45.1 C47.1 Q12.1 Q12.4 R36.1 U10.6 U11.6 U12.6 | length 993.2
  Top Layer w12: U12.6@2863.31,1435.59 2874.53,1446.81 C47.1@2874.53,1480 ; C47.1@2875,1480 2875,1665 2895,1685 3105,1685 3145,1645 3195,1645 3210,1630 C42.1@3210,1610.47
  Top Layer w15: C42.1@3210,1610.47 C42.1@3210,1608.35 ; U10.6@3256.69,1609.41 3211.06,1609.41 C42.1@3210,1608.35 ; R36.1@3415,1457.72 3366.89,1457.72 U11.6@3366.57,1457.4 3337.4,1486.57 Q12.4@3337.4,1514.41 3310.59,1514.41 3300,1525 3300,1560 3294.41,1565.59 Q12.1@3262.6,1565.59 3253.66,1574.53 C45.1@3210,1574.53 C42.1@3210,1608.35
VCAP: C8.1 C9.1 C10.1 C11.1 C12.1 C14.1 J1.7 R28.1 U3.4 | length 2555.9
  Top Layer w8: J1.7@1694.37,1680.63 1698.74,1685 v1(1720,1685) ; U3.4@2974.68,1438.9 2974.68,1415.32 2980,1410 3015,1410 3024.53,1400.47 C14.1@3024.53,1380
  Top Layer w20: v2(2535,1305) C8.1@2620,1305 C9.1@2805,1305 ; v2(2955,1215) 2955,1270 C12.1@2990,1305 ; C14.1@3024.53,1380 3024.53,1309.53 3020,1305 C11.1@3175,1305 C10.1@3360,1305
  Signal Layer 1 w8: v1(1720,1685) 1890,1685 v1(1965,1610) ; v1(1965,1355) 2095,1355 2145,1305 v2(2535,1305)
  Bottom Layer w8: v1(1965,1355) 1946,1374 1946,1581 1965,1600 v1(1965,1610) R28.1@2007.28,1610
  Bottom Layer w20: v2(2535,1305) 2625,1215 v2(2955,1215)
VCAP_LOOPBACK: J1.6 Q10.2 R33.1 | length 233.4
  Top Layer w8: J1.6@1694.37,1559.37 1709.37,1559.37 v1(1710,1560)
  Bottom Layer w8: v1(1710,1560) 1710,1565.69 1799.31,1655 1799.31,1669.31 1805,1675 Q10.2@1827.4,1675 1857.28,1675 R33.1@1865,1667.28
VCC_GATED1: C23.1 C24.1 C25.1 Q15.2 Q15.3 R20.1 R22.1 U7.8 U8.5 | length 1807.7
  Top Layer w10: U8.5@1698.31,1320.59 1682.72,1336.18 R20.1@1682.72,1360 1685.43,1357.28 C23.1@1720,1357.28 ; C23.1@1715.43,1357.72 R22.1@1760,1357.72 v1(1760,1375) ; v2(1930,1150) 1928.39,1151.61 U7.8@1928.39,1173.39 1928.39,1187.32 1933.78,1192.72 C24.1@1975,1192.72 1975,1220.47 C25.1@1980,1225.47 ; v2(2300,1095) 2300,1110 2320,1130 2410,1130 2440,1160 2440,1250 2545,1355 2610,1355 2620,1365 Q15.2@2620,1382.6 2620,1405 2625.72,1410.72 2639.28,1410.72 2645.59,1404.41 Q15.3@2645.59,1382.6
  Bottom Layer w10: v1(1760,1375) 1865,1375 1890,1350 1890,1150 ; v2(1930,1150) 1890,1150 ; v2(2300,1095) 2300,1051 2265,1016 1939,1016 1890,1065 1890,1150
VCC_GATED2: C19.1 C20.1 C21.1 Q14.2 Q14.3 U5.12 U6.7 | length 1229
  Top Layer w10: v1(1770.59,1599.41) U5.12@1808.86,1599.41 ; U6.7@2127.32,1652.2 U6.7@2133.39,1652.2 2167.8,1652.2 2175,1645 2175,1610 v1(2165,1600) ; v2(2435,1420) 2480,1420 ; Q14.2@2480,1382.6 2480,1420 ; Q14.3@2505.59,1382.6 2505.59,1409.41 2495,1420 2480,1420
  Signal Layer 1 w10: v1(1770.59,1599.41) 1840.59,1599.41 1890,1550 1995,1550 2065,1620 2145,1620 v1(2165,1600)
  Bottom Layer w10: v1(1770.59,1599.41) 1806.69,1599.41 C19.1@1810,1602.72 ; C21.1@2125,1652.28 2125,1624.53 C20.1@2120,1619.53 2145.47,1619.53 v1(2165,1600) 2300,1600 2435,1465 v2(2435,1420)
VCC_MCU: C16.1 C17.1 C28.1 C30.1 C31.1 C32.1 C33.1 C34.1 C35.1 C38.1 C39.1 C43.1 Q13.4 R10.2 R29.1 R30.1 R31.2 R32.1 R37.1 U4.3 U4.7 U4.8 U9.10 U9.15 U9.24 U9.33 U9.36 U9.39 U9.40 U9.41 U9.43 U9.55 U10.1 Y1.2 | length 1255.6
  Top Layer w8: v1(1090,1255) 1097.72,1262.72 R31.2@1097.72,1285 ; v1(1102.05,1617.95) U9.15@1126.46,1617.95 ; v1(1105,1440) 1125.67,1440 U9.24@1126.46,1440.79 ; U9.10@1230,1644.33 U9.10@1230.79,1643.54 v1(1230.79,1669.21) ; v1(1230.79,1310.79) U9.33@1230.79,1336.46 ; U9.36@1289.84,1336.46 1289.84,1305.16 v1(1290,1305) ; U9.39@1348.9,1336.46 1348.9,1311.1 1353.58,1306.42 v1(1368.58,1306.42) ; U9.40@1368.58,1336.46 v1(1368.58,1306.42) ; U9.41@1388.27,1336.46 1388.27,1308.27 1370.43,1308.27 v1(1368.58,1306.42) ; U9.43@1433.54,1362.05 1452.95,1362.05 v2(1460,1355) ; U9.55@1433.54,1598.27 1435.28,1600 v1(1455,1600) ; Q13.4@1752.4,1454.41 1785.59,1454.41 v1(1790,1450) R37.1@1790,1427.72
  Bottom Layer w8: v1(1102.05,1617.95) 1126.61,1617.95 C33.1@1129.57,1615 ; v1(1105,1440) C35.1@1132.28,1440 ; v1@1230,1311.57 v1(1230.79,1310.79) 1245,1325 C28.1@1245,1337.28 ; v1(1230.79,1669.21) 1215,1653.43 C31.1@1215,1642.72 1232.28,1642.72 1245,1630 1245,1615 1252.72,1607.28 R30.1@1270,1607.28 ; C30.1@1285,1337.28 1285,1310 v1(1290,1305) ; C34.1@1345,1337.28 1345,1315 1353.58,1306.42 v1(1368.58,1306.42) 1381.42,1306.42 1388.95,1313.95 1388.95,1336.24 C32.1@1390,1337.28 ; C38.1@1427.72,1405 1460,1372.72 v2(1460,1355) 1486,1381 1523.28,1381 C17.1@1525,1382.72 ; C39.1@1432.72,1570 1432.72,1577.72 v1(1455,1600) ; v2(1505,1310) R10.2@1527.28,1310 ; C17.1@1525.79,1383.5 C17.1@1525,1382.72 ; Y1.2@1566.69,1383.5 1565.91,1382.72 C17.1@1525,1382.72 ; U4.7@1572.6,1710 U4.7@1577.6,1710 U4.8@1615,1710 1617.72,1712.72 v1(1642.72,1712.72) 1660.43,1695 C16.1@1675,1695 ; v1(1905,1610) 1902.72,1612.28 R29.1@1902.72,1635 1905,1637.28 R32.1@1905,1667.28
  Bottom Layer w10: v1(1520,1520) 1540.2,1540.2 U4.3@1540.2,1556.46
  Bottom Layer w15: C43.1@3345,1605.47 3349.53,1610 v4(3405,1610)
  other v4: 3405,1660 3345,1710 3405,1710
VCC_SENSE: C46.1 Q14.4 Q15.4 R39.1 R40.1 U9.23 U12.1 | length 2394.1
  Top Layer w8: v1(1085.47,1460.47) U9.23@1126.46,1460.47 ; R40.1@2685,1427.72 v1(2685,1455)
  Top Layer w12: Q14.4@2505.59,1457.4 2505.59,1434.41 2512.28,1427.72 R39.1@2545,1427.72 ; R39.1@2555,1427.72 2645,1427.72 ; Q15.4@2645.91,1457.72 Q15.4@2645.59,1457.4 2645.59,1428.31 2645,1427.72 ; U12.1@2776.69,1435.59 2733.94,1435.59 C46.1@2730,1439.53 2718.19,1427.72 R40.1@2685,1427.72 2645,1427.72
  Signal Layer 1 w8: v1(1085.47,1460.47) 1111.4,1460.47 1124,1447.87 1124,1436 1195,1365 1390,1365 1517,1238 1963,1238 1990,1265 2020,1265 2075,1210 2690,1210 2710,1230 v1(2710,1265)
  Bottom Layer w8: v1(2685,1455) 2711,1429 2711,1266 v1(2710,1265)
VOLTAGE_WAVEFORM: R26.2 U7.7 U8.4 | length 317.1
  Top Layer w6: 1780,1265 1825,1265
  Top Layer w10: U8.4@1698.31,1269.41 1775.59,1269.41 1780,1265 ; 1825,1265 1870,1265 1902.8,1232.2 U7.7@1902.8,1173.39 1902.8,1135.08 1902.72,1135
VOLTAGEMEASUREEN: Q15.5 R42.1 U9.14 | length 2039.2
  Top Layer w8: v1(1135,1645) 1150.59,1645 U9.14@1152.05,1643.54
  Top Layer w12: v1(2565,1495) R42.1@2622.28,1495 2620,1492.72 Q15.5@2620,1457.4
  Signal Layer 2 w8: v1(1135,1645) 1134,1644 1134,1386.4 1174.4,1346 1420.92,1346 1490.92,1276 1494,1276 1495,1275 1610,1275 1630,1255 1928.13,1255 1942.13,1241 1966,1241 1990,1265 2455,1265 2525,1335 2525,1455 v1(2565,1495)
VOLTAGESENSEIN: pad.@2225,1080 R23.2 U7.5 | length 730.5
  Top Layer w10: R23.2@1800,1247.28 1800,1170 ; U7.5@1851.61,1187.32 1817.32,1187.32 1800,1170 ; pad.@2225,1080 2161,1016 1819,1016 1800,1035 1800,1170
VOLTAGETRIGGER: pad.@2850,1050 R21.2 U8.1 U9.12 | length 2346.1
  Top Layer w8: U9.12@1191.42,1643.54 v1(1191.42,1668.58) ; U8.1@1611.69,1320.59 1612.28,1320 v1(1640,1320)
  Top Layer w10: R21.2@1565,1307.72 1577.87,1320.59 U8.1@1611.69,1320.59
  Signal Layer 1 w8: v1(1640,1320) 1660,1320 1675,1305 2030,1305 2090,1245 2630,1245 2680,1295 2760,1295 2800,1255 2800,1200 v1(2850,1150)
  Signal Layer 2 w8: v1(1191.42,1668.58) 1170,1647.17 1170,1390 1185,1375 1560,1375 1615,1320 v1(1640,1320)
  Bottom Layer w8: pad.@2850,1050 v1(2850,1150)
VREF: R22.2 R24.1 U7.3 | length 164.9
  Top Layer w10: R22.2@1760,1322.28 R24.1@1800,1322.28 1817.28,1305 1865,1305 1877.2,1317.2 U7.3@1877.2,1346.61 U7.3@1877.2,1352.68
VREF_BUF: R23.1 U6.5 U7.1 U7.2 U9.20 | length 1943.3
  Top Layer w8: v1(1105.47,1519.53) U9.20@1126.46,1519.53
  Top Layer w10: R23.1@1800,1282.72 1872.72,1282.72 1902.8,1312.8 U7.2@1902.8,1346.61 1902.8,1352.68 1928.39,1352.68 1950,1331.06 v1(1950,1260) ; v1(2015,1500) 2115,1500 2195,1580 2195,1680 2171.61,1703.39 U6.5@2133.39,1703.39 U6.5@2127.32,1703.39
  Signal Layer 1 w8: v1(1105.47,1519.53) 1145,1480 1145,1435 1194,1386 1398.4,1386 1529.4,1255 1945,1255 v1(1950,1260)
  Bottom Layer w8: v1(1950,1260) 2015,1325 v1(2015,1500)
pads on no net: ANT1. D8.2 D8.5 J1. J2. J3. P1. P2. Q11.3 Q11.4 Q11.5 SW1. U4.9 U5.7 U5.8 U5.9 U9.2 U9.3 U9.4 U9.45 U10.2 U10.5 U12.2 U12.5 Y1.7

## Polygon pours and split planes (outlines as drawn)
GND on Top Layer "Top Layer-No Net" (solid, pour order 8): 1000,1750 1000,1000 1565,1000 1565,1750 1285,1750
VCC_MCU on Top Layer "Top Layer-No Net" (solid, pour order 0): 3450,1580 3450,1750 3325,1750 3325,1580
GND on GND "Top Layer-No Net" (solid, pour order 2): 1000,1000 1000,1750 3450,1750 3450,1000
VCC_MCU on VCC "Top Layer-No Net" (solid, pour order 4): 1000,1000 1000,1750 3450,1750 3450,1000
GND on Bottom Layer "Top Layer-No Net" (solid, pour order 6): 1145,1630 1145,1350 1415,1350 1420,1350 1420,1630

## Keep-outs
Keep-Out Layer:
  the board outline again, w10

## Other copper
Top Layer:
  pour cut-out: 1000,1000 1490,1000 1490,1145 1000,1145
GND:
  pour cut-out: 3025,1515 3025,1395 3165,1395 3165,1515
  pour cut-out: 1000,1000 1490,1000 1490,1145 1000,1145
VCC:
  pour cut-out: 3025,1515 3025,1395 3165,1395 3165,1515
  pour cut-out: 1000,1000 1490,1000 1490,1145 1000,1145

## Silkscreen, mask and mechanical layers (free items; w line width, h text height)
Top Overlay:
  region: 1016.89,1094.12 1052.18,1094.12 1052.18,1112.96 1045,1112.96 1045,1130 1062.49,1105.48 1063.69,1105.48 1081.48,1130 1081.48,1112.96 1074.3,1112.96 1074.3,1094.12 1109.59,1094.12 1109.59,1112.96 1102.41,1112.96 1102.41,1141.36 1109.59,1141.36 1109.59,1160.2 1081.63,1160.2 1063.69,1135.38 1062.79,1135.38 1044.85,1160.2 1016.89,1160.2 1016.89,1141.36 1023.77,1141.36 1023.77,1112.96 1016.89,1112.96
  text "Triumvi V12" at 1120,1105 h30
Bottom Overlay:
  text "GND" at 2590,1010 h30 r270
  text "Curr" at 2690,1010 h30 r270
  text "CMP" at 2790,1010 h30 r270
Mechanical 14:
  lines w60: 970,970 3480,970 ; 970,1780 3480,1780
Mechanical 16:
  lines w20: 1000,800 1000,1950 ; 3450,800 3450,1950

## Text inside footprints (layer, text, board x,y; h text height)
C18: Bottom Overlay "+" at 1784.49,1400.67 h48